# Altium PCB Copy of PCB1.PcbDoc
Units mil, origin at the board's own origin, x right, y up, seen from the top; angles counter-clockwise.
Board outline 730 x 585 mil, 2 copper layers (Top Layer, Bottom Layer), stack 61.756 mil thick; 16 components, 11 nets, 73 pads, 18 vias.
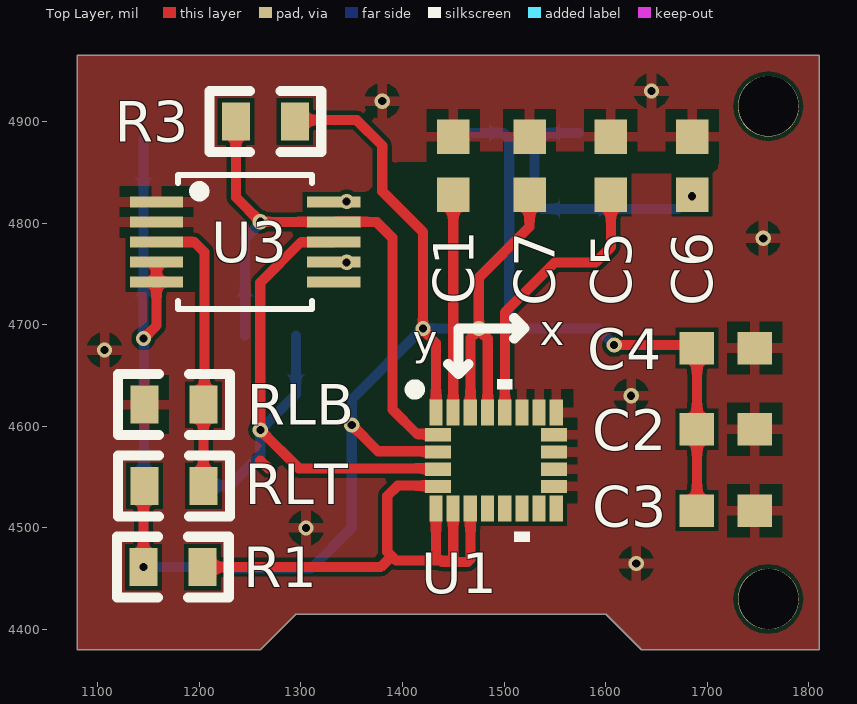
[diagram p0: Top Layer view]
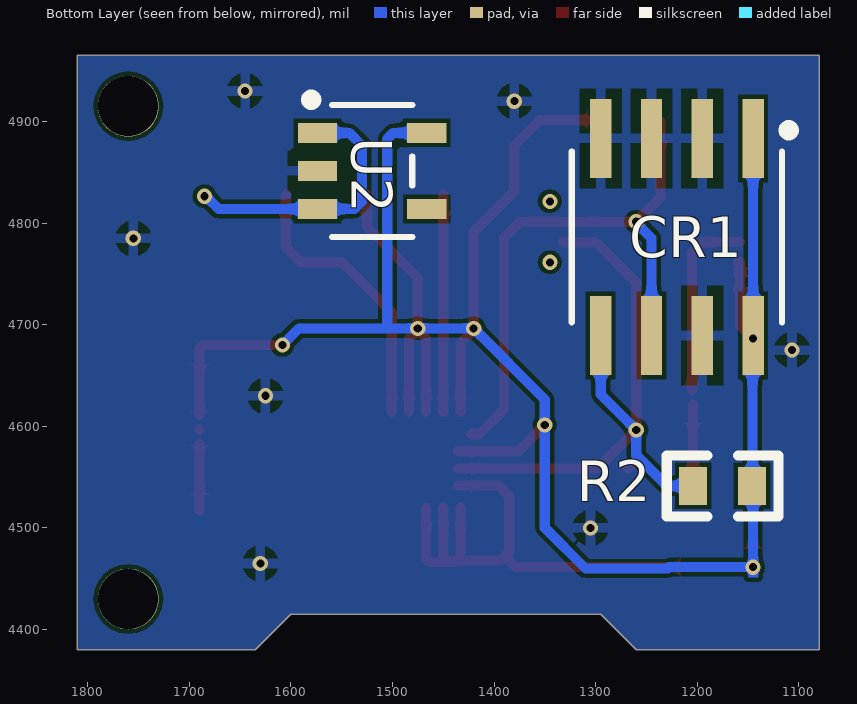
[diagram p1: Bottom Layer view, seen from below]

## Layer stack, top to bottom
Top Solder: solder mask 1, SM-001, Dk 4
Top Layer: signal copper 1.378
Dielectric 1: core 59, Core-043, Dk 4.3
Bottom Layer: signal copper 1.378
Bottom Solder: solder mask 1, SM-001, Dk 4

## Board outline
1080,4380 1080,4965 1810,4965 1810,4380 1635,4380 1600,4415 1295,4415 1260,4380
cut-out: 1275,5055

## Design rules (kind name [scope] priority, off if disabled: settings)
Clearance gaohaoyuan [All] p1: gap=4 ignorepadtopadclearanceinfootprint=TRUE
Clearance [All] p2: gap=10 ignorepadtopadclearanceinfootprint=FALSE except(0: Arc-Hole Track-Hole SMDPad-Hole THPad-Hole Via-Hole Fill-Hole Poly-Hole Region-Hole Text-Hole)
PolygonConnect [All] p1: connectstyle=Relief reliefconductorwidth=10 reliefentries=4 polygonreliefangle="90 Angle" airgapwidth=10
RoutingVias [All] p1: holewidth=28 width=50 viastyle="Through Hole" minholewidth=28 minwidth=50 maxholewidth=28 maxwidth=50
SolderMaskExpansion [All] p1: expansion=4 istentingtop=FALSE
Width [All] p1: maxlimit=10 minlimit=10 preferedwidth=10
30 further rules are at their usual default settings.

## Components (designator, comment, footprint, x,y, rotation, side; value= is the part's Value field where it differs from the comment)
C1 "100NF" CC0603N_YAG 1450,4856.35 r90 top
C2 "100NF" CC0603N_YAG 1718.27,4597.02 r180 top
C3 "100NF" CC0603N_YAG 1718.27,4517.02 r0 top
C4 "10UF" CC0603N_YAG 1718.27,4677.02 r0 top
C5 "10NF" CC0603N_YAG 1605,4856.35 r90 top
C6 "10UF" CC0603N_YAG 1685,4856.35 r270 top
C7 "10UF" CC0603N_YAG 1525,4856.35 r270 top
CR1 "M24C02-WMN6TP" SO-8_STM 1220,4786.35 r270 bottom
R1 "10K" 0603_VIS 1174,4461.35 r0 top
R2 "10K" 0603_VIS 1175,4541.35 r0 bottom
R3 "10K" 0603_VIS 1265,4900 r180 top
RLB "" 0603_VIS 1175,4621.35 r0 top
RLT "" 0603_VIS 1175,4541.35 r0 top
U1 "LSM9DS1TR" LGA-24_3X3P5X1_STM 1492.05,4566.26 r0 top
U2 "TLV70333DBVR" DBV5_TEX 1520,4851.35 r180 bottom
U3 "LTC4316CMS#PBF" MSOP-10_MS_LIT 1245,4781.35 r0 top

## Footprints (in the part's own frame and the unit in brackets; to place one, negate y for a bottom-side part, rotate by r counter-clockwise, add the part's x,y. Pads: shape width x height; smd on the part's side, far side on the other; paste and mask are expansions set on the pad)
0603_VIS [mil]
  rect 27.68x37.4 smd paste+0 mask+0: 1(-29,0) 2(29,0)
  silkscreen extent -55,-30 55,30, body extent 0,0 10,10, height 10
CC0603N_YAG [mil]
  rect 34x32 smd paste+0 mask+0: 1(-28.5,0) 2(28.5,0)
  body extent 0,0 10,10, height 10
DBV5_TEX [mil]
  rect 38.5x20 smd paste+0 mask+0: 1(-53.75,37.4) 2(-53.75,0) 3(-53.75,-37.4) 4(53.75,-37.4) 5(53.75,37.4)
  silkscreen extent -65,-65 40,75, body extent 0,0 10,10, height 10
LGA-24_3X3P5X1_STM [mm]
  rect 0.331x0.654 smd: 1(-1.505,1.2) 6(-1.505,-1.2) 7(-1.075,-1.2) 8(-0.645,-1.2) 9(-0.215,-1.2) 10(0.215,-1.2) 11(0.645,-1.2) 12(1.075,-1.2) 13(1.505,-1.2) 18(1.505,1.2) 19(1.075,1.2) 20(0.645,1.2) 21(0.215,1.2) 22(-0.215,1.2) 23(-0.645,1.2) 24(-1.075,1.2)
  rect 0.654x0.331 smd: 2(-1.45,0.645) 3(-1.45,0.215) 4(-1.45,-0.215) 5(-1.45,-0.645) 14(1.45,-0.645) 15(1.45,-0.215) 16(1.45,0.215) 17(1.45,0.645)
  silkscreen extent -2.16,-2.03 0.84,2.03, body extent 0,0 0.25,0.25, height 0.25
MSOP-10_MS_LIT [mil]
  rect 52.5x11 smd paste+0 mask+0: 1(-87.25,39.4) 2(-87.25,19.7) 3(-87.25,0) 4(-87.25,-19.7) 5(-87.25,-39.4) 6(87.25,-39.4) 7(87.25,-19.7) 8(87.25,0) 9(87.25,19.7) 10(87.25,39.4)
  silkscreen extent -66,-66 66,66, body extent 0,0 10,10, height 10
SO-8_STM [mil]
  rect 78x21 smd paste+0 mask+0: 1(-97,75) 2(-97,25) 3(-97,-25) 4(-97,-75) 5(97,-75) 6(97,-25) 7(97,25) 8(97,75)
  silkscreen extent -110,-104 84,115, body extent 0,0 10,10, height 10

## Part data
C1 C2 C3 C4 C5 C6 C7: library part CC0603KRX7R9BB103, "No Description Available", Built_By=EMA_UL_Team, Copyright="Copyright (C) 2018 Accelerated Designs. All rights reserved", Manufacturer_Part_Number=CC0603KRX7R9BB103, RefDes=RefDes, SourceLibrary=Yageo_2008-01-01_ChipCaps1, Type=DEV, Vendor=Yageo
CR1 U1 U2 U3: "No Description Available", Copyright="Copyright (C) 2018 Accelerated Designs. All rights reserved", RefDes=RefDes, Type=DEV
  CR1: Built_By=EMA_UL_Team, Manufacturer_Part_Number=M24C02-WMN6TP, SourceLibrary=Update_to_database_2020-12-04, Vendor=STMicroelectronics
  U1: Built_By=EMA_Jessica, Manufacturer_Part_Number=LSM9DS1TR, SourceLibrary=Updates_to_database_2020-11-03, Vendor=STMicroelectronics
  U2: Built_By=EMA_Molly, Manufacturer_Part_Number=TLV70333DBVR, SourceLibrary=TI_2019-05-11, Vendor="Texas Instruments"
  U3: Built_By=EMA_UL_Team, Manufacturer_Part_Number=LTC4316CMS#PBF, SourceLibrary=LinearTech_2016-05-13_6, Vendor="Linear Technology"
R1 R2 R3 RLB RLT: library part MCT0603MD1002DP500, "No Description Available", Built_By=EMA_UL_Team, Copyright="Copyright (C) 2018 Accelerated Designs. All rights reserved", Manufacturer_Part_Number=MCT0603MD1002DP500, RefDes=RefDes, SourceLibrary=Vishay_2014-12-31, Type=DEV, Vendor=Vishay

## Free pads (board coordinates)
  round 60 hole 59.06: 2(1760,4430) 2(1760,4915)

## Via types
v1: diameter 15, hole 8, Top Layer to Bottom Layer, 18 vias

## Nets (pads, with @x,y where several pads share a name; then routed paths per layer and width w, separated by ;. In a path a pad name is that pad's centre, name@x,y a point inside that pad or via, vN(x,y) a via of type N, cw(c..) or ccw(c..) an arc to the next point about the centre after c; other vN are vias at no path point)
3.3V: C2.2 C3.1 C4.1 C7.2 CR1.1 CR1.8 R1.1 R2.1 R3.1 RLT.1 U1.1 U1.3 U1.22 U1.23 U2.5 U3.4 U3.5 | length 2454
  Top Layer w10: v1(1145,4461.35) RLT.1@1145,4539.85 ; v1(1145,4686.35) 1157.75,4699.1 U3.5 1157.75,4761.15 1157.95,4761.35 1160,4761.35 1159.7,4761.65 U3.4 ; R3.1 1295.35,4901.35 1355,4901.35 1380,4876.35 1380,4831.35 1420,4791.35 v1(1420,4696.35) 1420,4695 1432.99,4682.01 U1.1@1432.99,4614.26 ; v1(1350,4601.35) 1375.87,4575.48 U1.3@1435.15,4575.48 ; U1.23@1466.84,4614.26 1466.84,4686.84 1475,4695 1483.77,4686.23 U1.22@1483.77,4614.26 ; v1(1475,4696.35) 1475,4746.35 1525,4796.35 C7.2 ; v1(1608.27,4680) 1686.79,4680 C4.1 C2.2@1689.77,4611.24 ; C3.1 C2.2@1689.77,4583.02
  Bottom Layer w10: R2.1@1145,4527.35 v1(1145,4461.35) 1227.5,4461.35 1228.85,4460 1310,4460 1350,4500 v1(1350,4601.35) 1350,4626.35 v1(1420,4696.35) v1(1475,4696.35) 1505,4696.35 ; CR1.1 CR1.8 1145.5,4688.85 1145.5,4541.85 R2.1 ; U2.5 1499.14,4888.76 1505,4882.9 1505,4696.35 ; v1(1608.27,4680) 1591.92,4696.35 1505,4696.35
+5: C6.2 U2.1 U2.3 | length 267.1
  Bottom Layer w10: U2.1 1542.4,4888.76 1530,4876.35 1530,4821.35 1537.4,4813.95 U2.3 1671.24,4813.95 1683.65,4826.35 v1(1685,4826.35)
GND: C1.2 C2.1 C3.2 C4.2 C5.2 C6.1 C7.1 CR1.2 CR1.3 CR1.4 CR1.7 RLB.1 U1.14 U1.15 U1.16 U1.17 U1.18 U1.19 U1.20 U2.2 U3.1 U3.2
  other v1: 1630,4465 1305,4500 1625,4630 1106.73,4675 1755,4785 1380,4920 1645,4930
PULL_UP1: R1.2 U1.5 U1.6 U1.7 U1.8 | length 574.5
  Top Layer w10: R1.2 1378.42,4461.35 1389.21,4472.14 ; 1432.99,4467.93 1437.27,4467.93 ; U1.6@1432.99,4519.77 1432.99,4472.21 1437.27,4467.93 ; U1.5@1435.15,4541.62 1395.27,4541.62 1385,4531.35 1385,4476.35 1389.21,4472.14 ; 1449.92,4466.35 1464.14,4466.35 ; U1.7@1449.92,4519.77 1449.92,4467.93 1437.27,4467.93 ; U1.8@1466.84,4519.77 1466.84,4469.05 1464.14,4466.35 ; 1389.21,4472.14 1393.42,4467.93 1437.27,4467.93 ; 1437.27,4467.93 1438.84,4466.35 1464.14,4466.35
PULL_UP2: CR1.5 R2.2 U1.4 U3.8 | length 625.6
  Top Layer w10: U3.8 1331.75,4780.85 1299.5,4780.85 1260,4741.35 v1(1260,4596.35) 1297.8,4558.55 U1.4@1435.15,4558.55
  Bottom Layer w10: R2.2 1230,4541.35 1260,4571.35 v1(1260,4596.35) 1295,4631.35 CR1.5
PULL_UP3: CR1.6 R3.2 U1.2 U3.9 | length 575
  Top Layer w10: R3.2 1236,4825.35 v1(1260,4801.35) 1260.15,4801.2 1334.85,4801.2 1335,4801.35 1365,4801.35 1365.41,4800.95 1374.55,4800.95 1390,4785.49 1390,4616.65 1414.24,4592.41 U1.2@1422.61,4592.41
  Bottom Layer w10: CR1.6 1245,4785 1260,4800 v1(1260,4801.35)
SCL: U3.10
  other v1: 1345,4821.35
SDA: U3.7
  other v1: 1345,4761.35
U1C1: C1.1 U1.24 | length 213.6
  Top Layer w10: U1.24@1449.92,4614.26 1449.92,4827.77 C1.1
U1CAP: C5.1 U1.21 | length 280.2
  Top Layer w10: U1.21@1500.7,4614.26 1500.7,4712.06 1550,4761.35 1590,4761.35 1605,4776.35 C5.1
XORL: RLB.2 RLT.2 U3.3 | length 267.4
  Top Layer w10: U3.3 1195,4781.35 1205,4771.35 RLB.2@1205,4635.32 ; RLT.2 RLB.2
pads on no net: U1.9 U1.10 U1.11 U1.12 U1.13 U2.4 U3.6
copper on no net: | length 16.3
  Top Layer w10: 1260,4566.35 1267.8,4558.55 ; 1689.77,4597.02 1690,4597.24
  Bottom Layer w10: 1205,4541.35 1205,4546.35

## Polygon pours and split planes (outlines as drawn)
GND on Bottom Layer "GND_L02_P009" (solid, pour order 9): 1810,4965 1080,4965 1080,4380 1260,4380 1295,4415 1600,4415 1635,4380 1810,4380
no net on Bottom Layer "NONET_L02_P001" (solid, pour order 1): 3460,4015
GND on Top Layer "GND_L01_P010" (solid, remove dead copper, pour order 10): 1810,4965 1080,4965 1080,4380 1260,4380 1295,4415 1600,4415 1635,4380 1810,4380

## Other copper
Top Layer:
  pour cut-out: 1395,4860 1445,4860 1445,4690 1443.13,4691.87 1370,4700 1363.88,4828.88
  pour cut-out: 1386.49,4882.84
  pour cut-out: 1430,4870 1710,4870 1710,4853.85 1705,4848.85 1430,4848.85
  pour cut-out: 1180,4775 1183.65,4771.35 1205,4771.35 1205,4735 1200,4730 1197.55,4732.45 1168.55,4732.45 1168.55,4763.55
  pour cut-out: 1445,4601.35 1535,4601.35 1535,4536.35 1445,4536.35

## Silkscreen, mask and mechanical layers (free items; w line width, h text height)
Top Overlay:
  lines w10: 1445,4661.35 1455,4651.35 ; 1465,4661.35 1455,4651.35 ; 1510,4686.35 1520,4696.35 ; 1510,4706.35 1520,4696.35 ; 1455,4651.35 1455,4696.35 1520,4696.35
  text "x" at 1535,4680 h30
  text "y" at 1410,4670 h30
Mechanical 1:
  the board outline again, w10

## Text inside footprints (layer, text, board x,y; h text height)
CR1: Mechanical 13 "*" at 1174.5,4862.85 h50 r90
U1: Mechanical 13 "*" at 1435.34,4575.12 h50
U2: Mechanical 13 "*" at 1557,4865.75 h50
U3: Mechanical 13 "*" at 1186.5,4789.35 h50